# Altium PCB PCB_Example.PcbDoc
Units mil, origin at the board's own origin, x right, y up, seen from the top; angles counter-clockwise.
Board outline 6000 x 4000 mil, 4 copper layers (L1 (Signal), L2 (GND), L3 (PWR), L4 (Signal)), stack 61.811 mil thick; 35 components, 27 nets, 171 pads, 32 vias.
Unrouted connection lines stored in the file: 42.
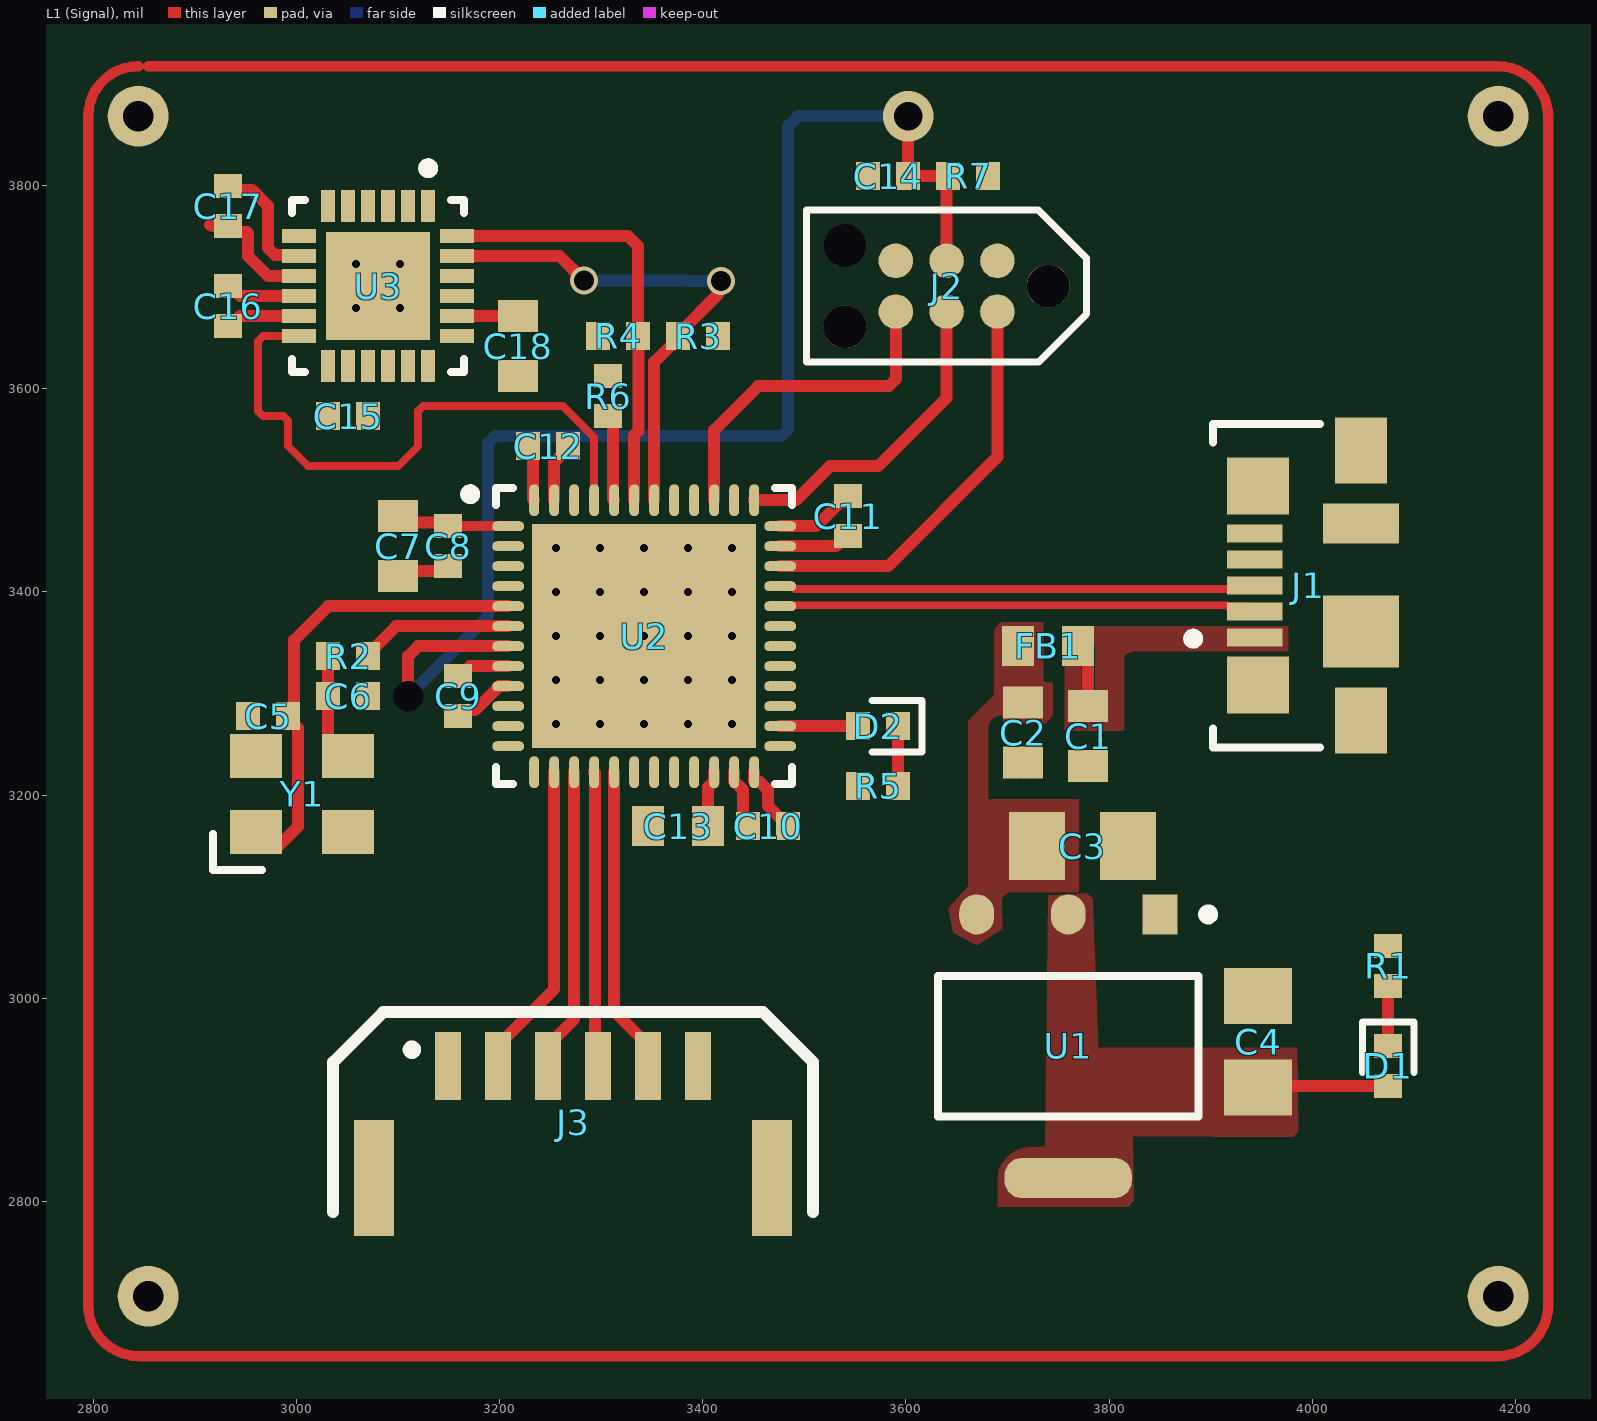
[diagram p0: L1 (Signal) view]
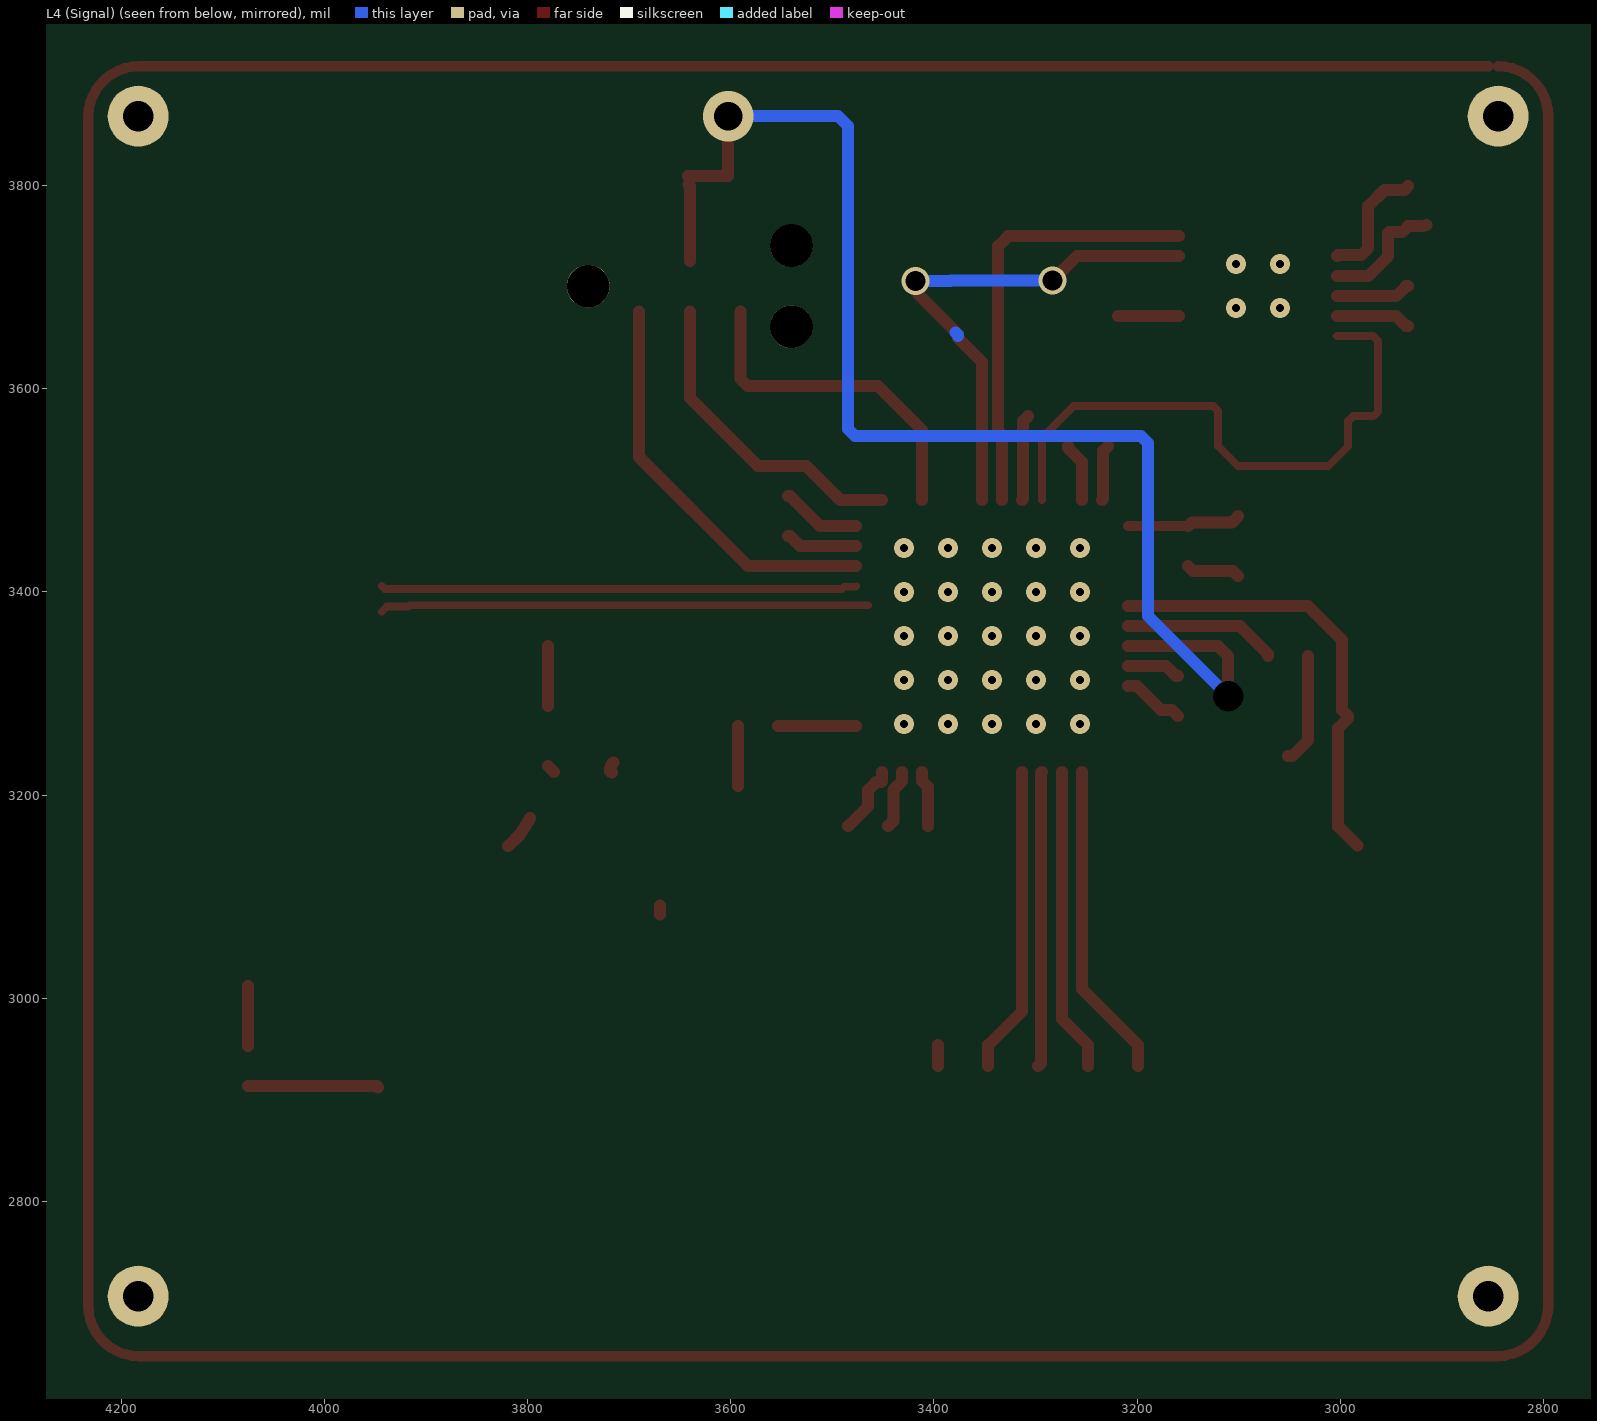
[diagram p1: L4 (Signal) view, seen from below]
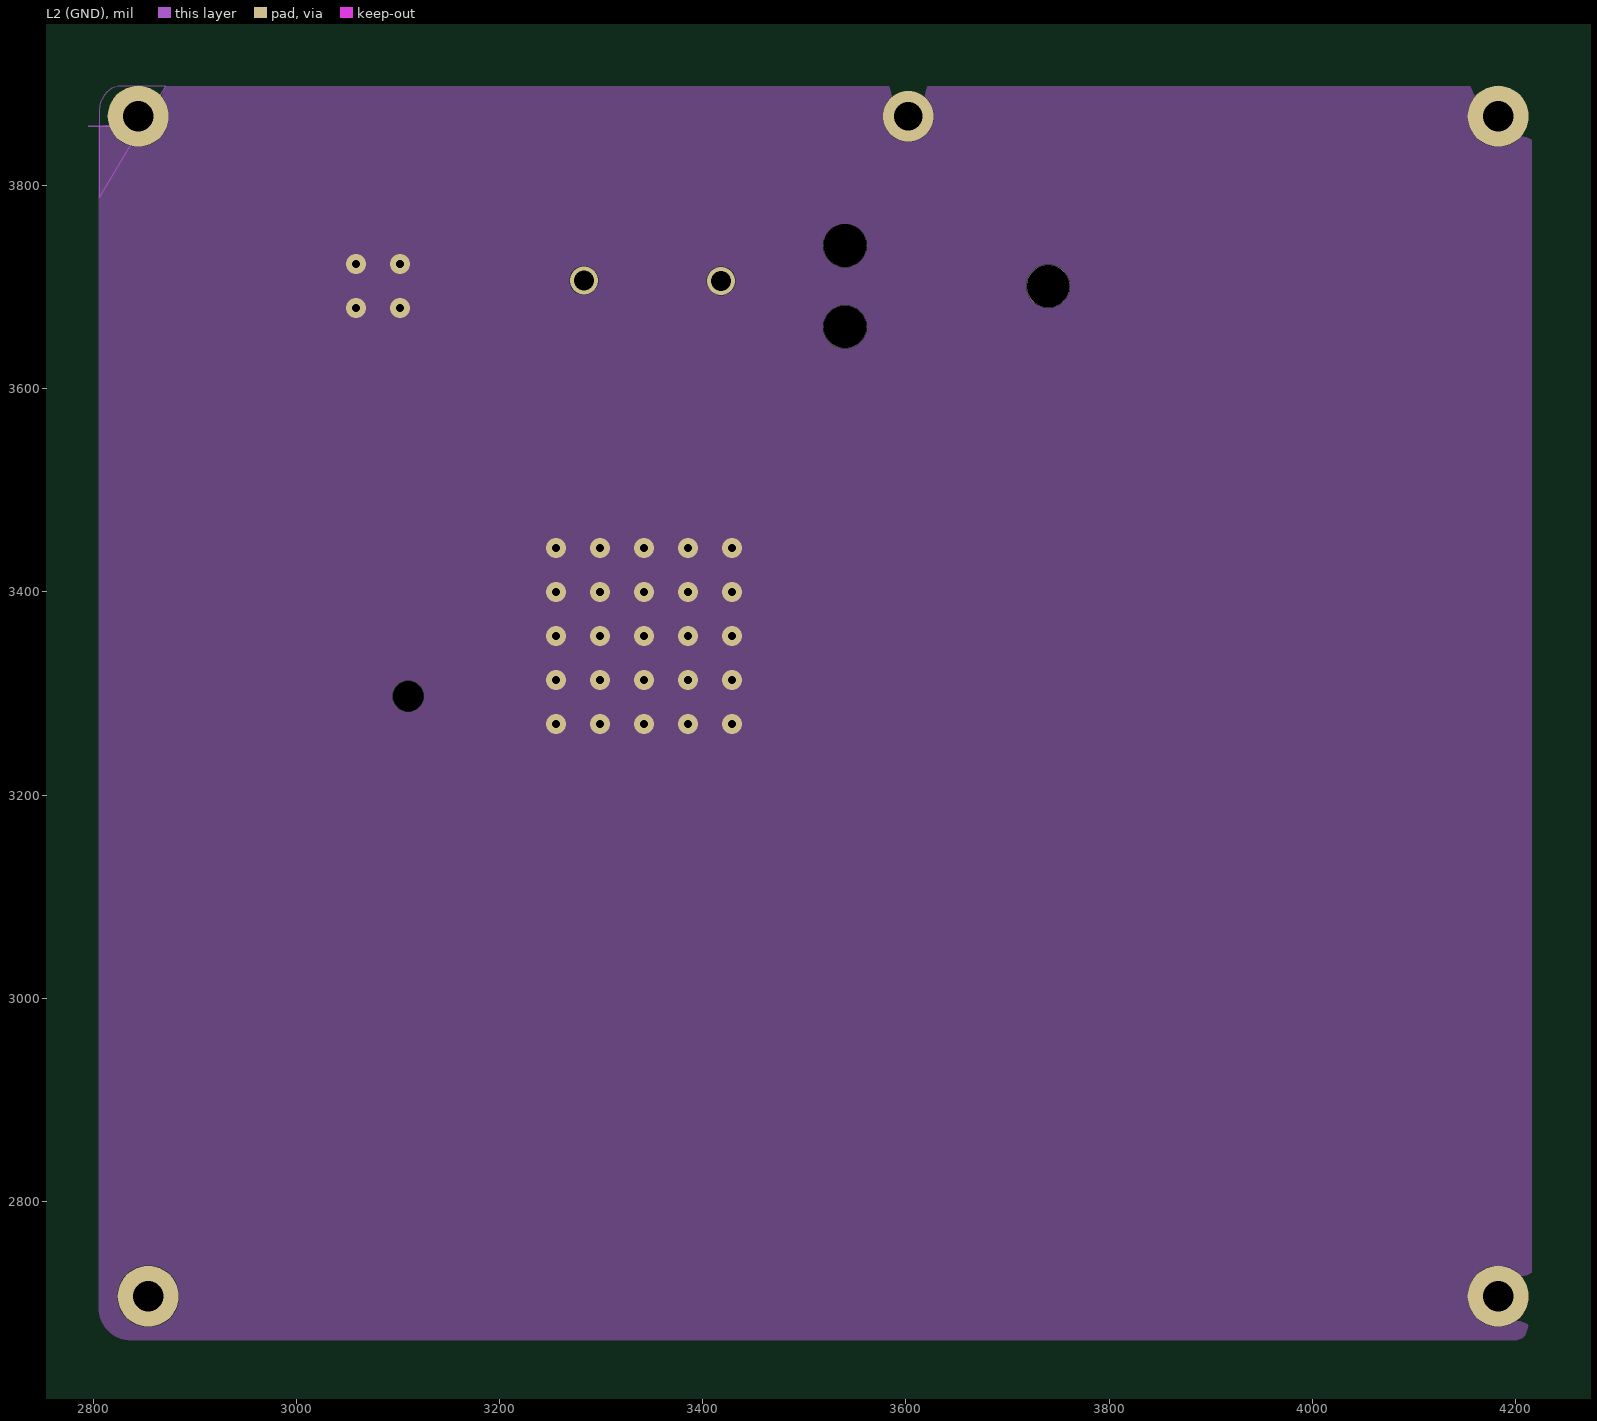
[diagram p2: L2 (GND)]
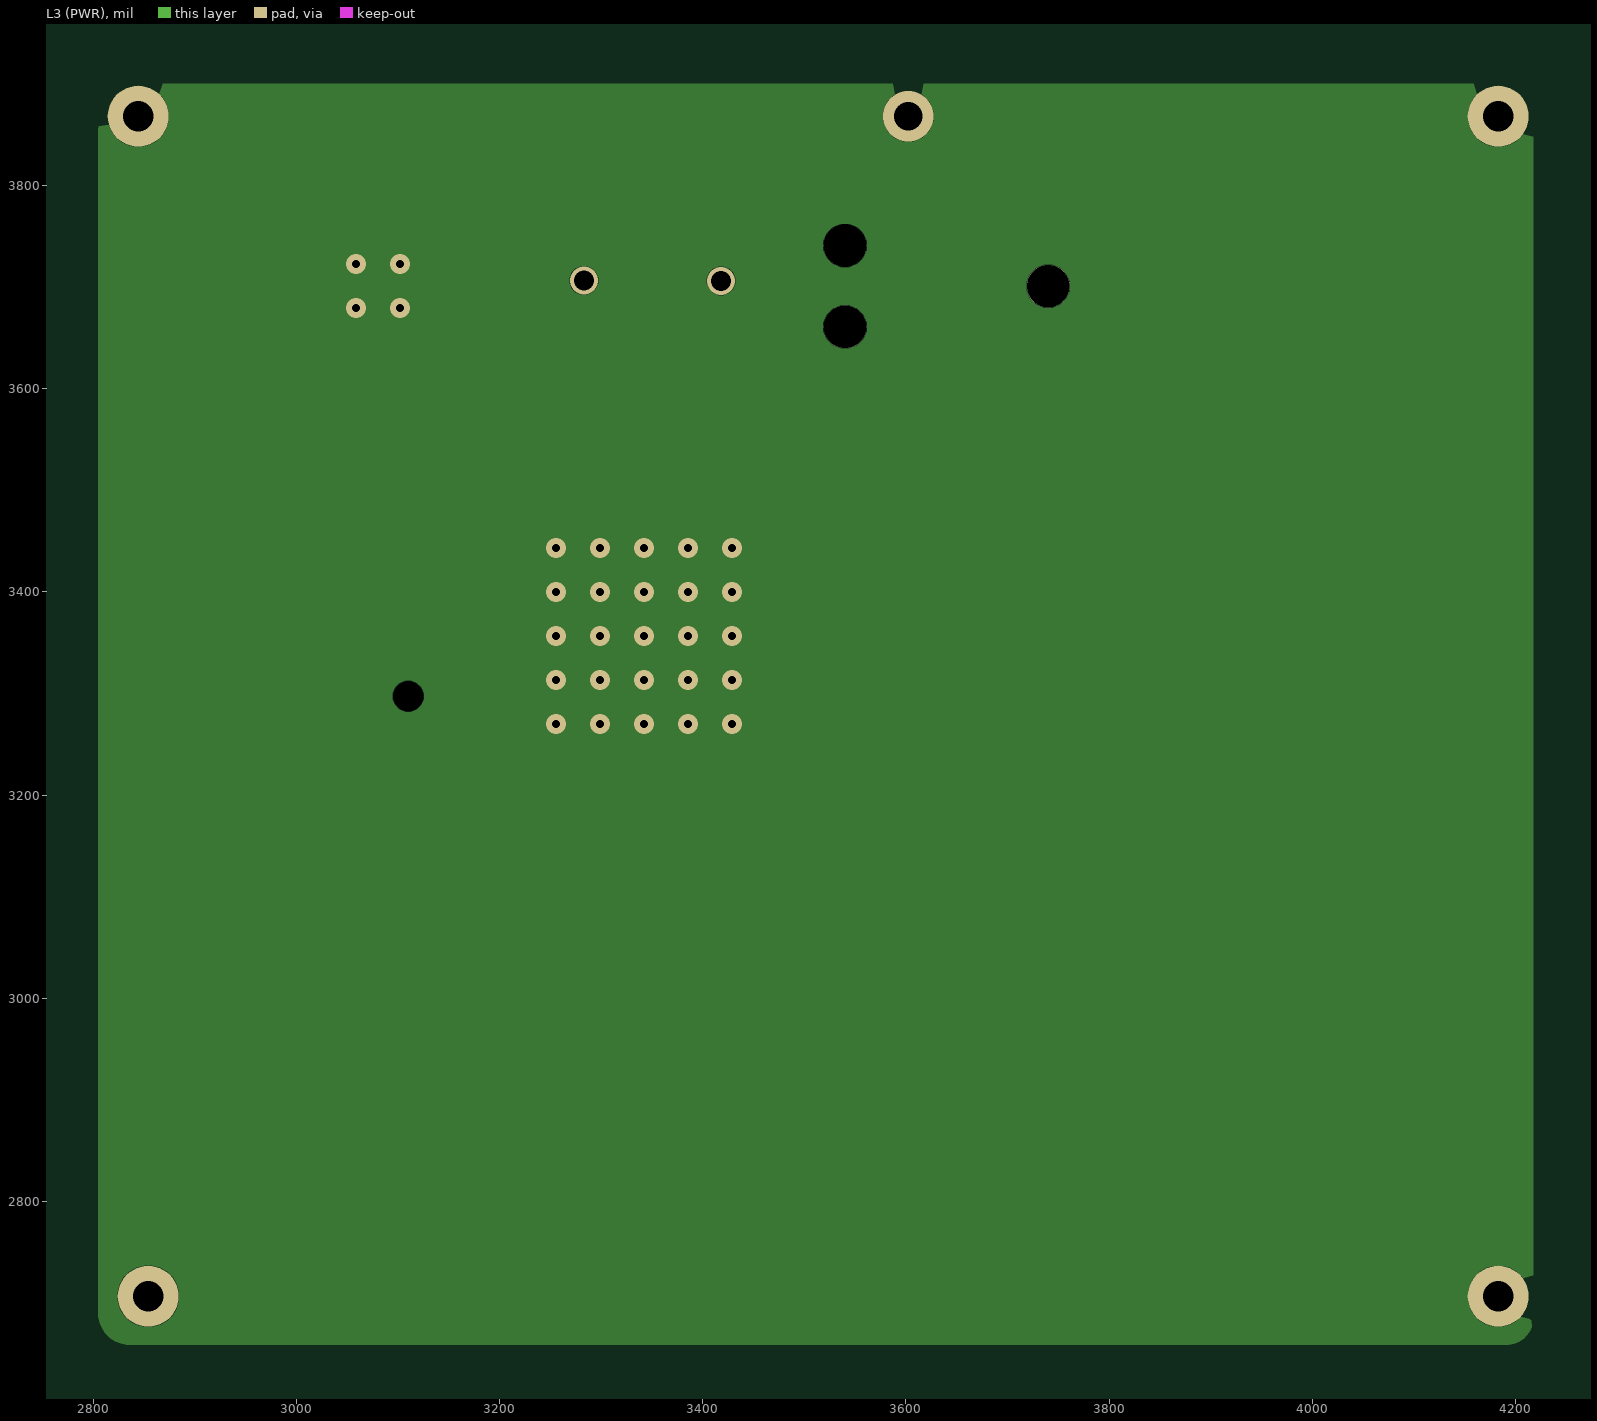
[diagram p3: L3 (PWR)]
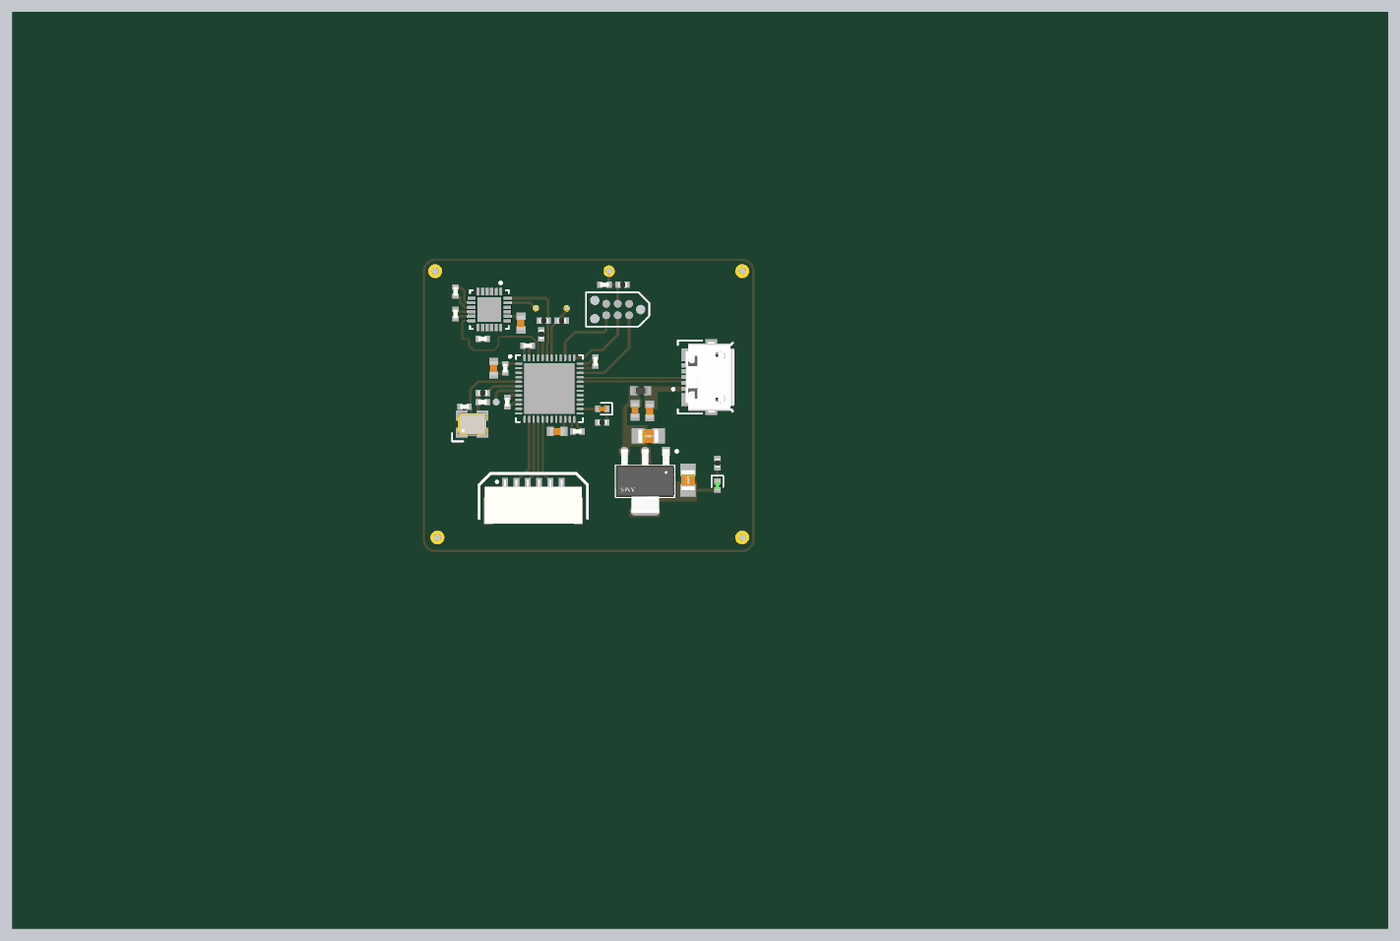
[diagram p4: 3D render of the assembled board from above, using the file's embedded part models]

## Layer stack, top to bottom
Top Solder: solder mask 1, SM-001, Dk 4
L1 (Signal): signal copper 1.378
Dielectric 1: prepreg 7.874, PP-017, Dk 4.6
L2 (GND): signal copper 0.689
Dielectric 3: core 41.9291, Core-039, Dk 4.6
L3 (PWR): signal copper 0.689
Dielectric 5: prepreg 7.874, PP-017, Dk 4.6
L4 (Signal): signal copper 1.378
Bottom Solder: solder mask 1, SM-001, Dk 4

## Board outline
1000,1000 7000,1000 7000,5000 1000,5000

## Design rules (kind name [scope] priority, off if disabled: settings)
Clearance [All] p1: gap=0.2 ignorepadtopadclearanceinfootprint=FALSE
DiffPairsRouting [All] p1: maxlimit=10 minlimit=5 mostfreqgap=10 toplayer_maxgap=5 toplayer_prefgap=5 toplayer_minwidth=7.52 toplayer_maxwidth=7.52 toplayer_prefwidth=7.52 bottomlayer_maxgap=5 bottomlayer_prefgap=5 bottomlayer_minwidth=7.52 bottomlayer_maxwidth=7.52 bottomlayer_prefwidth=7.52 impedanceprofiledriven=TRUE impedanceprofileid={DAC41B38-49FF-45C2-91D9-9FDC63346AAB} impedanceprofilevalue=90.000000 maxuncoupledlength=500
PolygonConnect [All] p1: connectstyle=Direct reliefconductorwidth=10 reliefentries=4 polygonreliefangle="90 Angle" airgapwidth=10
RoutingVias [All] p1: holewidth=11.81 width=27.56 viastyle="Through Hole" minholewidth=9.84 minwidth=21.65 maxholewidth=15.75 maxwidth=35.43
SolderMaskExpansion [All] p1: expansion=0 istentingtop=FALSE
SupplyNets "Schematic Supply Nets_2" [InNet('+3V3')] p1: voltage=0.000
SupplyNets "Schematic Supply Nets_1" [InNet('GND')] p2: voltage=0.000
SupplyNets "Schematic Supply Nets" [InNet('+5')] p3: voltage=0.000
UnRoutedNet [All] p1: checkbadconnections=TRUE
Width [All] p1: maxlimit=39.37 minlimit=7.87 preferedwidth=11.81 midlayer1_minwidth=10 midlayer1_maxwidth=10 midlayer1_prefwidth=10 midlayer2_minwidth=10 midlayer2_maxwidth=10 midlayer2_prefwidth=10 minimp=50.000000 maximp=50.000000 favimp=50.000000
28 further rules are at their usual default settings.

## Classes and differential pairs
differential pair USB_D: +USB_D_P -USB_D_N

## Components (designator, comment, footprint, x,y, rotation, side; value= is the part's Value field where it differs from the comment)
C1 "2u2" CAP_0603 3779.53,3257.87 r90 top
C2 "2u2" CAP_0603 3715.46,3261.35 r90 top
C3 "22u" CAP_0805 3773.9,3149.61 r180 top
C4 "22u" CAP_0805 3946.85,2956.97 r270 top
C5 "10p" CAP_0402 2972.44,3277.56 r0 top
C6 "10p" CAP_0402 3051.18,3297.24 r180 top
C7 "2u2" CAP_0603 3100.39,3444.88 r90 top
C8 "100n" CAP_0402 3149.61,3444.88 r90 top
C9 "100n" CAP_0402 3159.45,3297.24 r270 top
C10 "100n" CAP_0402 3464.57,3169.29 r0 top
C11 "100n" CAP_0402 3543.31,3474.41 r90 top
C12 "100n" CAP_0402 3248.03,3543.31 r180 top
C13 "2u2" CAP_0603 3375.98,3169.29 r0 top
C14 "100n" CAP_0402 3582.68,3809.06 r0 top
C15 "100n" CAP_0402 3051.18,3572.83 r180 top
C16 "100n" CAP_0402 2933.07,3681.1 r90 top
C17 "10n" CAP_0402 2933.07,3779.53 r90 top
C18 "2u2" CAP_0603 3218.5,3641.73 r90 top
D1 "GREEN" LED_0402_GREEN 4074.8,2933.07 r90 top
D2 "RED" LED_0402_RED 3572.83,3267.72 r0 top
FB1 "120R" FB_0603 3740.16,3346.46 r180 top
J1 "473460001" FP-473460001-MFG 4034.45,3406 r90 top
J2 "TC2030-NL" TC2030-NL-FP 3640.16,3700.79 r180 top
J3 "SM06B-GHS-TB" SM06B-GHS-TB 3272.64,2877.95 r0 top
R1 "1k" RES_0402 4074.8,3031.5 r270 top
R2 "0R" RES_0402 3051.18,3336.61 r0 top
R3 "2k2" RES_0402 3395.67,3651.57 r0 top
R4 "2k2" RES_0402 3316.93,3651.57 r180 top
R5 "1k" RES_0402 3572.83,3208.66 r0 top
R6 "10k" RES_0402 3307.09,3592.52 r270 top
R7 "10k" RES_0402 3661.42,3809.06 r0 top
U1 "AMS1117-3.3" FP-AMS1117-IPC_C 3759.84,2952.76 r270 top
U2 "STM32F411CEU6" STM-UFQFPN48_L 3342.52,3356.3 r0 top
U3 "MPU-6050" IS-QFN-24_V 3080.71,3700.79 r270 top
Y1 "24MHz" XTAL_3225 3005.91,3200.79 r0 top

## Footprints (in the part's own frame and the unit in brackets; to place one, negate y for a bottom-side part, rotate by r counter-clockwise, add the part's x,y. Pads: shape width x height; smd on the part's side, far side on the other; paste and mask are expansions set on the pad)
CAP_0402 [mm]
  rect 0.6x0.7 smd: 1(-0.5,0) 2(0.5,0)
  body extent -0.5,-0.26 0.5,0.26, height 0.37
CAP_0603 [mm]
  rect 0.8x1 smd: 1(-0.75,0) 2(0.75,0)
  body extent -0.8,-0.4 0.8,0.4, height 0.51
CAP_0805 [mm]
  rect 1.4x1.7 smd: 1(-1.143,0) 2(1.143,0)
  body extent -1.15,-0.76 1.15,0.79, height 1.01
FB_0603 [mm]
  rect 0.8x1 smd: 1(-0.75,0) 2(0.75,0)
  body extent -0.8,-0.4 0.8,0.4, height 0.81
FP-473460001-MFG [mm]
  rect 0.45x1.38 smd paste+0 mask+0: 1(-1.3,2.31) 2(-0.65,2.31) 3(0,2.31) 4(0.65,2.31) 5(1.3,2.31)
  rect 1.425x1.55 smd paste+0 mask+0: 6(-2.488,2.225) 7(2.488,2.225)
  rect 1.65x1.3 smd paste+0 mask+0: 8(-3.375,-0.35) 11(3.375,-0.35)
  rect 1.8x1.9 smd paste+0 mask+0: 9(-1.15,-0.35)
  rect 1x1.9 smd paste+0 mask+0: 10(1.55,-0.35)
  silkscreen extent -4.05,0.67 4.05,3.97, body extent -4.3,-2.48 4.3,3.45, height 0.25
FP-AMS1117-IPC_C [mm]
  rect 1.004x0.872 smd paste+0 mask+0: 1(-3.295,2.29)
  rrect100% 1.004x0.872 smd paste+0 mask+0: 2(-3.295,0) 3(-3.295,-2.29)
  rrect87% 1.004x3.182 smd paste+0 mask+0: 4(3.295,0)
  silkscreen extent -3.42,-3.25 1.75,3.63, body extent -3.9,-3.35 3.9,3.35, height 0.25
IS-QFN-24_V [mm] "QFN, 24-Leads, Body 4x4mm, Pitch 0.5mm, Thermal Pad 2.7x2.6mm"
  rect 0.8x0.35 smd: 1(-2,1.25) 2(-2,0.75) 3(-2,0.25) 4(-2,-0.25) 5(-2,-0.75) 6(-2,-1.25) 13(2,-1.25) 14(2,-0.75) 15(2,-0.25) 16(2,0.25) 17(2,0.75) 18(2,1.25)
  rect 0.35x0.85 smd mask+0.102: 7(-1.25,-1.975) 8(-0.75,-1.975) 9(-0.25,-1.975) 10(0.25,-1.975) 11(0.75,-1.975) 12(1.25,-1.975) 19(1.25,1.975) 20(0.75,1.975) 21(0.25,1.975) 22(-0.25,1.975) 23(-0.75,1.975) 24(-1.25,1.975)
  rect 2.7x2.6 smd: 25(0,0)
  silkscreen extent -3.07,-2.15 2.15,2.15, body extent -2,-2 2,2, height 0.95
LED_0402_GREEN [mm]
  rect 0.6x0.7 smd: A(-0.5,0) K(0.5,0)
  silkscreen extent -0.15,-0.65 1.1,0.65, body extent -0.51,-0.25 0.51,0.25, height 0.45
LED_0402_RED [mm]
  rect 0.6x0.7 smd: A(-0.5,0) K(0.5,0)
  silkscreen extent -0.15,-0.65 1.1,0.65, body extent -0.51,-0.25 0.51,0.25, height 0.45
RES_0402 [mm]
  rect 0.6x0.7 smd: 1(-0.5,0) 2(0.5,0)
  body extent -0.5,-0.25 0.5,0.25, height 0.3
SM06B-GHS-TB [mm]
  rect 0.65x1.7 smd: 1(-3.125,1.4) 2(-1.875,1.4) 3(-0.625,1.4) 4(0.625,1.4) 5(1.875,1.4) 6(3.125,1.4)
  rect 1x2.9 smd: ""(-4.975,-1.4) ""(4.975,-1.4)
  silkscreen extent -6,-2.25 6,2.75, body extent -5.38,-2.8 5.38,2.05, height 4.26
STM-UFQFPN48_L [mm] "QFN, 48-Leads, Body 7.1x7.1mm, Pitch 0.5mm, Thermal Pad 5.6x5.6mm, IPC High Density"
  oval 0.8x0.25 smd: 1(-3.4,2.75) 2(-3.4,2.25) 3(-3.4,1.75) 4(-3.4,1.25) 5(-3.4,0.75) 6(-3.4,0.25) 7(-3.4,-0.25) 8(-3.4,-0.75) 9(-3.4,-1.25) 10(-3.4,-1.75) 11(-3.4,-2.25) 12(-3.4,-2.75) 25(3.4,-2.75) 26(3.4,-2.25) 27(3.4,-1.75) 28(3.4,-1.25) 29(3.4,-0.75) 30(3.4,-0.25) 31(3.4,0.25) 32(3.4,0.75) 33(3.4,1.25) 34(3.4,1.75) 35(3.4,2.25) 36(3.4,2.75)
  oval 0.25x0.8 smd: 13(-2.75,-3.4) 14(-2.25,-3.4) 15(-1.75,-3.4) 16(-1.25,-3.4) 17(-0.75,-3.4) 18(-0.25,-3.4) 19(0.25,-3.4) 20(0.75,-3.4) 21(1.25,-3.4) 22(1.75,-3.4) 23(2.25,-3.4) 24(2.75,-3.4) 37(2.75,3.4) 38(2.25,3.4) 39(1.75,3.4) 40(1.25,3.4) 41(0.75,3.4) 42(0.25,3.4) 43(-0.25,3.4) 44(-0.75,3.4) 45(-1.25,3.4) 46(-1.75,3.4) 47(-2.25,3.4) 48(-2.75,3.4)
  rect 5.6x5.6 smd: 49(0,0)
  silkscreen extent -4.47,-3.7 3.7,3.7, body extent -3.55,-3.55 3.55,3.55, height 0.6
TC2030-NL-FP [mil]
  round 33.98 smd: 1(-50,-25) 2(-50,25) 3(0,-25) 4(0,25) 5(50,-25) 6(50,25)
  round 42.01 hole 42.01 unplated: MH(-100,0) MH(100,-40) MH(100,40)
  silkscreen extent -138,-75 138,75
XTAL_3225 [mm]
  rect 1.3x1.1 smd: 1(-1.15,-0.95) 2(1.15,-0.95) 3(1.15,0.95) 4(-1.15,0.95)
  silkscreen extent -2.23,-1.89 -1,-1, body extent -1.6,-1.28 1.6,1.22, height 0.61

## Part data
C1 C2 C7 C13 C18: library part CAP_0603_16V, "Capacitor SMD 0603 16V"
C3 C4: library part CAP_0805_16V, "Capacitor SMD 0805 16V"
C5 C6 C8 C9 C10 C11 C12 C14 C15 C16 C17: library part CAP_0402_16V, "Capacitor SMD 0402 16V"
D1: library part LED_0402_GREEN, "LED 0402 GREEN SMD"
D2: library part LED_0402_RED, "LED 0402 RED SMD"
FB1: library part FB_0603, "Ferrite Bead SMD 0603"
J1: library part CMP-2000-05246-2, "CONN RCPT USB2.0 MICRO B SMD R/A", Current Rating=1.8A, Manufacturer=Molex, Package=0, Temperature="-30°C to +85°C", Temperature Range High=+85°C, Temperature Range Low=-30°C, Voltage Rating=30V, Automotive=No, Category=Conn, ComponentLink2Description=Datasheet, ComponentLink2URL=https://www.molex.com/webdocs/datasheets/pdf/en-us/0473460001_IO_CONNECTORS.pdf, Conn Orientation="Right Angle", Contact Material=Gold,Nickel, Device Class L1=Connectors, Device Class L2="USB Connectors", Device Class L3=unset, Digikey Description="CONN RCPT USB2.0 MICRO B SMD R/A", Footprint Url=https://www.molex.com/pdm_docs/sd/473460001_sd.pdf, Height=2.945mm, Is Female=yes, Lead Free=Yes, Manufacturer Part Number=473460001, Number Of Contacts=5, Octopart=https://octopart.com/47346-0001-molex-7164928, Pitch=0.65mm, RoHS=TRUE, Shielding=true, Usb Standard="USB 2.0"
J2: "Tag-Connect No-Solder SWD Debug Connector (No Legs) DO NOT PLACE", Manufacturer=Tag-Connect, Manufacturer Part Number=TC2030-NL-FP
J3: "Header Connector 6 Position 1.25MM Pitch SMD Horizontal JST GH", Manufacturer=JST, Manufacturer Part Number=SM06B-GHS-TB
R1 R2 R3 R4 R5 R6 R7: library part RES_0402, "Resistor SMD 0402"
U1: library part CMP-209535-000001-1, "LDO Voltage Regulators 1A, 3.3V", Dropout Voltage=1.1V, Manufacturer="Advanced Monolithic Systems", Max Junction Temp=+125°C, Max Power Dissipation=1.2W, Max Supply Voltage=15V, Nominal Supply Current=5mA, Output Current=1A, Output Voltage=3.3V, Package=AMS1117, Temperature="-40°C to +125°C", Temperature Range Low=-40°C, Automotive=No, Category=IC, ComponentLink2Description=Datasheet, ComponentLink2URL=http://www.advanced-monolithic.com/pdf/ds1117.pdf, Device Class L1="Integrated Circuits (ICs)", Device Class L2="Power Management ICs", Device Class L3="Voltage Regulators - Linear", Height=1.8mm, Ipc Land Pattern Name=SOT229P700X180-4, Lead Free=Yes, Manufacturer Part Number=AMS1117-3.3, Number Of Outputs=1, Octopart=https://octopart.com/ams1117-3.3-advanced+monolithic+systems-25899300, Output Type=Fixed, RoHS=TRUE, Standoff Height=0.64mm, Temperature Range High=+125°C
U2: library part CMP-0243-00165-1, "ARM Cortex-M4 32-bit MCU+FPU, 512 KB Flash, 128 KB RAM, 36 I/Os, 48-Pin UFQFPN, -40 to 85 degC, Tray", I/Os (High Current)=36, Operating Frequency(F) (Processor speed) (MHz)=100, Package Description=UFQFPN48, Package Reference="48-Pin Ultra Thin Fine Pitch Quad Flat No-Lead, 7 x 7 x 0.6 mm Body, 0.5 mm Pitch, Exposed Pad", Supply Voltage(Vcc) min (V)=1.7, ComponentLink1Description="Manufacturer URL", ComponentLink1URL=http://www.st.com/, ComponentLink2Description=Datasheet, ComponentLink2URL=http://www.st.com/st-web-ui/static/active/en/resource/technical/document/datasheet/DM00115249.pdf, Core="ARM Cortex-M4", DatasheetVersion="Rev. 6", FLASH Size (Prog) (kB)=512, Internal RAM Size (kB)=128, Mounting Technology="Surface Mount", Packing=Tray
U3: library part CMP-1753-00002-2, "3-Axis Gyroscope, Accelerometer and a Digital Motion Processor(TM) (DMP), 2.375 to 3.46 V, -40 to 85 degC, 24-Pin QFN, RoHS, Tape and Reel", Manufacturer=InvenSense, Standard Package=5,000, Category=Sensors,Transducers, Datasheet URL=http://datasheet.octopart.com/MPU-6050-InvenSense-datasheet-14421344.pdf, Datasheet Version="Rev. 3.3, 05/2012", Dynamic Catalog=MPU-6000™Series, Family=Multifunction, Featured Product=MPU-60506-Axis,IntegratedI²CSolution, Manufacturer URL=http://www.invensense.com/, Online Catalog=MPU-6000™Series, Other Names="1428-1007-2 / MPU6050", Output Type=Digital, Sensor Type=MotionTracking, Unit PriceUSD=Digital
Y1: library part TSX-3225_24.0000MF15X-AC, "Crystal SMD 24MHz 10PPM 7pF 3225", Load Capacitance=7pF, Manufacturer=Epson, Manufacturer Number="TSX-3225 24.0000MF15X-AC", ESR=40R, Type=XTAL

## Free pads (board coordinates)
  round 60 hole 30: 1(2844.49,3868.11) 2(2854.33,2706.69) 3(4183.07,3868.11) 4(4183.07,2706.69)
  round 6 hole 30: .(3110.24,3297.24)

## Via types
v1: diameter 19.68, hole 7.87, L1 (Signal) to L4 (Signal), 29 vias
v2: diameter 27.56, hole 19.68, L1 (Signal) to L4 (Signal), 2 vias
v3: diameter 50, hole 28, L1 (Signal) to L4 (Signal), 1 vias

## Nets (pads, with @x,y where several pads share a name; then routed paths per layer and width w, separated by ;. In a path a pad name is that pad's centre, name@x,y a point inside that pad or via, vN(x,y) a via of type N, cw(c..) or ccw(c..) an arc to the next point about the centre after c; other vN are vias at no path point)
+3V3: C4.2 C7.2 C8.2 C9.2 C10.2 C11.2 C12.2 C15.2 C17.2 D1.A J2.1 J3.1 R3.2 R4.2 R7.2 U1.2 U1.4 U2.1 U2.9 U2.24 U2.36 U2.48 U3.8 U3.13 | length 629.6
  L1 (Signal) w9.8: C8.2 U2.1
  L1 (Signal) w11.81: C17.2 2936.74,3795.54 2956.43,3795.54 2972.44,3779.53 2972.44,3738.22 2979.36,3731.3 3001.97,3731.3 U3.8 ; C7.2 3106.57,3468.24 3145.94,3468.24 C8.2 ; C9.2 3165.35,3283.46 3176.18,3283.46 3199.8,3307.09 U2.9 ; C12.2 3233.27,3538.39 3233.27,3491.14 U2.48 ; U2.24 3450.79,3213.58 3451.77,3212.6 3456.66,3212.6 3464.57,3204.7 3464.57,3188.98 C10.2 ; U2.36 3511.81,3464.57 3541.34,3494.09 C11.2 ; C4.2 3948.27,2913.39 D1.A
+5: C2.2 C3.2 FB1.2 U1.3 | length 8.7
  L1 (Signal) w11.81: U1.3 U1.3@3669.68,3091.18
GND: C1.1 C2.1 C3.1 C4.1 C5.1 C6.1 C7.1 C8.1 C9.1 C10.1 C11.1 C12.1 C13.1 C14.1 C15.1 C16.1 C17.1 C18.1 J1.5 J2.5 J3.6 R1.1 R5.1 R6.1 U1.1 U2.8 U2.23 U2.35 U2.47 U2.49 U3.1 U3.9 U3.11 U3.18 U3.25 Y1.2 Y1.4 | length 566.5
  L1 (Signal) w11.81: 2915.25,3760.95 ccw(c2920.23,3771.65) 2920.23,3759.84 C17.1 2938.98,3753.94 2951.74,3753.94 2952.76,3752.92 2952.76,3730.31 2972.44,3710.63 U3.9 ; C16.1 2935.04,3661.42 2944.88,3671.26 U3.11 ; C7.1 3105.32,3420.28 3144.68,3420.28 C8.1 ; C9.1 3161.42,3316.93 3171.26,3326.77 U2.8 ; U2.47 3253.94,3527.56 3267.72,3541.34 C12.1 ; J3.6 J3.6@3395.67,2953.74 ; U2.23 3431.1,3213.58 3439.76,3204.92 3439.76,3174.41 C10.1 ; U2.35 3531.5,3444.88 3541.34,3454.72 C11.1 ; C2.1 cw(c3707.28,3223.64) 3718.85,3223.64 C2.1@3716.97,3221.98 ; C1.1@3773.7,3222.52 C1.1 ; C3.1@3797.24,3177.17 3807.37,3161.14 C3.1
  other v1: 3255.91,3269.69 3299.21,3269.69 3342.52,3269.69 3385.83,3269.69 3429.13,3269.69 3255.91,3312.99 3299.21,3312.99 3342.52,3312.99 3385.83,3312.99 3429.13,3312.99 3255.91,3356.3 3299.21,3356.3 3342.52,3356.3 3385.83,3356.3 3429.13,3356.3 3255.91,3399.61 3299.21,3399.61 3342.52,3399.61 3385.83,3399.61 3429.13,3399.61 3255.91,3442.91 3299.21,3442.91 3342.52,3442.91 3385.83,3442.91 3429.13,3442.91 3059.06,3679.13 3102.36,3679.13 3059.06,3722.44 3102.36,3722.44
IMU_CPOUT: C18.2 U3.20 | length 60
  L1 (Signal) w11.81: U3.20 C18.2
IMU_INT: U2.45 U3.12 | length 598.7
  L1 (Signal) w7.87: U3.12 2967.21,3651.57 2962.6,3646.96 2962.6,3577.45 2967.21,3572.83 2987.51,3572.83 2992.13,3568.22 2992.13,3543.31 3011.81,3523.62 3100.39,3523.62 3120.08,3543.31 3120.08,3578.06 3124.69,3582.68 3262.57,3582.68 3293.31,3551.94 U2.45
IMU_REGOUT: C16.2 U3.10 | length 74
  L1 (Signal) w11.81: C16.2 2935.04,3700.79 2944.88,3690.95 U3.10
IMU_SCL: R3.1 U2.42 U3.23 | length 517.4
  L1 (Signal) w11.81: U3.23 3259.28,3730.32 v2(3283.18,3706.41) ; U2.42 3352.36,3625.98 3375.98,3649.61 R3.1 3375.98,3653.54 3415.15,3692.71 3415.15,3703.05 v2(3418.17,3706.06)
  L4 (Signal) w11.81: v2(3283.18,3706.41) 3383.01,3706.41 3383.37,3706.06 v2(3418.17,3706.06) ; 3375.98,3651.57 3375.98,3652.55 3378.45,3655.02
IMU_SDA: R4.1 U2.43 U3.24 | length 433.9
  L1 (Signal) w11.81: U3.24 3326.77,3750 3336.61,3740.16 R4.1 ; U2.43 3332.68,3554.36 3336.81,3558.49 R4.1@3336.81,3651.57
LED_PWR_K: D1.K R1.2 | length 59.1
  L1 (Signal) w11.81: D1.K R1.2
MCU_BOOT0: R6.2 U2.44 | length 85.1
  L1 (Signal) w11.81: R6.2 3312.01,3567.91 3312.01,3491.14 U2.44
MCU_LED_A: D2.A U2.26 | length 76.8
  L1 (Signal) w11.81: U2.26 D2.A
MCU_LED_K: D2.K R5.2 | length 59.1
  L1 (Signal) w11.81: R5.2 D2.K
MCU_NRST: C14.2 J2.3 pad.. R7.1 U2.7 | length 1299.4
  L1 (Signal) w11.81: pad.. 3110.24,3336.61 3120.08,3346.46 U2.7 ; v3(3602.36,3868.11) C14.2 R7.1 ; J2.3 3640.16,3799.36 R7.1@3641.69,3800.9
  L4 (Signal) w11.81: pad.. 3188.98,3375.98 3188.98,3546.23 3195.9,3553.15 3477.33,3553.15 3484.25,3560.07 3484.25,3858.27 3494.09,3868.11 v3@3582.68,3868.11
MCU_OSC_IN: C5.2 U2.5 Y1.1 | length 440.8
  L1 (Signal) w11.81: Y1.1@2983.14,3150.39 3001.97,3169.21 3001.97,3265.75 2992.13,3275.59 C5.2 2998.03,3283.46 2998.03,3352.36 3031.5,3385.83 U2.5
MCU_OSC_OUT: R2.2 U2.6 | length 151.2
  L1 (Signal) w11.81: R2.2 3070.87,3338.58 3098.43,3366.14 U2.6
MCU_PA4: J3.2 U2.14 | length 312.2
  L1 (Signal) w11.81: J3.2 3198.82,2953.74 3253.94,3008.86 U2.14
MCU_PA5: J3.3 U2.15 | length 300
  L1 (Signal) w11.81: J3.3 3248.03,2953.74 3273.62,2979.33 U2.15
MCU_PA6: J3.4 U2.16 | length 291
  L1 (Signal) w11.81: U2.16 3294.29,3221.46 3294.29,2936.02 J3.4
MCU_PA7: J3.5 U2.17 | length 303.2
  L1 (Signal) w11.81: U2.17 3312.99,2987.2 3346.46,2953.74 J3.5
MCU_SWCLK: J2.4 U2.37 | length 316
  L1 (Signal) w11.81: U2.37 3491.87,3490.16 3525.34,3523.62 3572.83,3523.62 3640.16,3590.94 J2.4
MCU_SWDIO: J2.2 U2.34 | length 401.4
  L1 (Signal) w11.81: U2.34 3582.68,3425.2 3690.16,3532.68 J2.2
MCU_SWO: J2.6 U2.39 | length 334.9
  L1 (Signal) w11.81: U2.39 3411.42,3559.06 3454.72,3602.36 3583.24,3602.36 3590.16,3609.28 J2.6
MCU_VCAP1: C13.2 U2.22 | length 55.6
  L1 (Signal) w11.81: C13.2 3405.51,3207.68 3411.42,3213.58 U2.22
USB_D_N: J1.2 U2.32 | length 481.6
  L1 (Signal) w7.52: U2.32@3464.57,3386.95 3915.69,3386.95 3917.13,3385.51 3938.41,3385.51 J1.2
USB_D_P: J1.3 U2.33 | length 469.5
  L1 (Signal) w7.52: U2.33 3476.82,3405.07 3488.28,3405.07 3490.51,3402.83 3940.33,3402.83 J1.3
VBUS: C1.2 FB1.1 J1.1 | length 59.1
  L1 (Signal) w11.81: C1.2 FB1.1@3779.53,3346.46
XTAL_IN: C6.2 R2.1 Y1.3 | length 108.9
  L1 (Signal) w11.81: R2.1 C6.2 3031.5,3253.94 3047.24,3238.19 Y1.3
pads on no net: J1.4 J1.6 J1.7 J1.8 J1.9 J1.10 J1.11 J2.MH J3. U2.2 U2.3 U2.4 U2.10 U2.11 U2.12 U2.13 U2.18 U2.19 U2.20 U2.21 U2.25 U2.27 U2.28 U2.29 U2.30 U2.31 U2.38 U2.40 U2.41 U2.46 U3.2 U3.3 U3.4 U3.5 U3.6 U3.7 U3.14 U3.15 U3.16 U3.17 U3.19 U3.21 U3.22
copper on no net: | length 5318
  L1 (Signal) w10: 2844.49,3917.32 ccw(c2844.49,3868.11) 2795.28,3868.11 2795.28,2697.64 ccw(c2845.28,2697.64) 2845.28,2647.64 4182.28,2647.64 ccw(c4182.28,2697.64) 4232.28,2697.64 4232.28,3867.32 ccw(c4182.28,3867.32) 4182.28,3917.32 2854.33,3917.32

## Polygon pours and split planes (outlines as drawn)
GND on L2 (GND) "GND_L02_P003" (solid, pour order 3): 2823.58,3893.37 2817.44,3888.66 2811.07,3879.22 2811.07,3796.84 2811.07,3874.06 cw(c2834.65,3874.06) 2834.65,3897.64 4187.7,3897.64 cw(c4187.7,3869.32) 4216.02,3869.32 4216.02,2680.58 cw(c4212.6,2680.58) 4212.6,2677.17 cw(c4198.66,2677.16) 4198.66,2663.23 2838.02,2663.23 cw(c2838.02,2695.75) 2805.5,2695.75 2805.5,3860.96 cw(c2843.6,3860.96) 2843.6,3899.06
no net on L2 (GND) "NONET_L02_P006" (solid, pour order 6): 2871.81,3897.64 2827.87,3897.64 ccw(c2827.87,3877.24) 2813.45,3891.66 ccw(c2831.14,3873.97) 2806.12,3873.97 2806.12,3787.67
no net on L2 (GND) "NONET_L02_P004" (solid, pour order 4): 2834.65,3858.27 ccw(c2834.65,3850.96) 2827.33,3850.96 2827.33,3847.95 ccw(c2817.02,3847.95) 2817.02,3858.27 2795.28,3858.27
+3V3 on L1 (Signal) "+3V3_L01_P014" (solid, pour order 14): 3690.34,2820.43 cw(c3723.34,2820.43) 3723.34,2853.43 3737.18,2854.49 3740.37,3101.46 3784.02,3103.59 3789.34,2951.36 3985.21,2951.36 3986.28,2863.01 3823.4,2864.07 3824.47,2794.88 3690.34,2794.88 3690.34,2809.96
+5 on L1 (Signal) "+5_L01_P013" (solid, pour order 13): 3687.18,3298.75 3661.42,3272.98 3661.42,3110.24 3641.62,3088.34 3646.82,3064.48 3669.82,3051.9 3694.98,3067.95 3694.54,3098.32 3700.62,3104.39 3770.03,3104.39 3770.03,3195.93 3681.1,3195.93 3681.1,3265.78 cw(c3693.68,3265.78) 3693.68,3278.36 3694.98,3278.36 ccw(c3694.98,3272.28) 3688.9,3272.28 3688.44,3270.77 ccw(c3690.05,3274.49) 3690.05,3270.44 3745.41,3270.44 cw(c3747.13,3272.16) 3744.69,3272.16 3744.69,3310.6 3739.48,3310.6 cw(c3739.48,3314.66) 3736.61,3311.79 cw(c3739.48,3314.66) 3735.42,3314.66 3735.42,3370.25 3694.51,3370.25 cw(c3694.51,3371.88) 3693.36,3370.73 3687.69,3370.93 3687.65,3370.97 ccw(c3688.8,3369.82) 3687.18,3369.82
VBUS on L1 (Signal) "VBUS_L01_P011" (solid, pour order 11): 3976.14,3366.15 3763.54,3366.15 ccw(c3763.54,3356.66) 3756.83,3363.37 3756.55,3363.09 3756.55,3263.03 3811.68,3263.03 ccw(c3811.68,3266.82) 3814.37,3264.14 ccw(c3813.02,3265.48) 3814.92,3265.48 3814.92,3336.41 cw(c3827,3324.33) 3827,3341.41 3976.41,3341.41 3976.41,3365.88
GND on L3 (PWR) "GND_L03_P015" (solid, pour order 15): 2805.39,3855.42 2805.39,2689.49 ccw(c2835.87,2689.49) 2835.87,2659 4191.32,2659 ccw(c4191.32,2685.37) 4217.69,2685.37 4217.69,3870.25 ccw(c4188.02,3870.25) 4188.02,3899.91 2821.04,3899.91 ccw(c2821.04,3885.08) 2806.21,3885.08